# EAGLE board schematic - Copy (EAGLE 8.6.0)

Size 47 x 28 mm. Coordinates in mm from the lower left corner, seen from the top.
Outline: 0,0 47,0 47,28 0,28 0,0
Copper layers (1*16): Top 0.035mm / dielectric 1.5mm / Bottom 0.035mm
Design rules "default": minimum track width 6mil, minimum drill 0.35mm, track to track 6mil, track to pad 6mil, pad to pad 6mil, via to via 6mil, smd to smd 6mil, copper to edge 40mil, drill to drill 6mil, minimum pad ring 10mil, minimum via ring 8mil, stop-mask expansion 4mil, vias tented up to drill 0mil, thermal gap 10mil

## Footprints (pad centres in the part's own frame; a part is rotated, then mirrored left to right if it is on the bottom)
C1210 = smd 1.6 x 2.7: 1 -1.4,0; 2 1.4,0
C0603 = smd 1.1 x 1: 1 -0.85,0; 2 0.85,0
C1206 = smd 1.6 x 1.8: 1 -1.4,0; 2 1.4,0
MINI2-F3-B = smd 1.22 x 0.85: NEG 0,1.55; POS 0,-1.5
FTDI_DEVICE_RA_SMT = smd 1 x 3: 1 -6.35,5; 2 -3.81,5; 3 -1.27,5; 4 1.27,5; 5 3.81,5; 6 6.35,5 | hole 1.4: -5.08,0; 5.08,0
XAL4020 = smd 0.98 x 3.7: 1 -1.185,0; 2 1.185,0
SML0603 = smd 0.8 x 0.8: A 0.75,0; C -0.75,0
WIRELESS-NRF24L01 = drill 1 square: 1 -12.7,6.35 | drill 1: 2 -10.16,6.35; 3 -12.7,3.81; 4 -10.16,3.81; 5 -12.7,1.27; 6 -10.16,1.27; 7 -12.7,-1.27; 8 -10.16,-1.27
CSM-7X-DU = smd 5.5 x 2: 1 -4.75,0; 2 4.75,0
R0603 = smd 1 x 1.1: 1 -0.85,0; 2 0.85,0
PUSHBUTTON_SMD_SJ = smd 2 x 2: P$1 3,0; P$2 -3,0
SOT23-3 = smd 0.8 x 0.9: 1 -0.95,-1; 2 0.95,-1; 3 0,1.1
TQFP32-08 = smd 1.27 x 0.559: 1 -4.293,2.8; 2 -4.293,2; 3 -4.293,1.2; 4 -4.293,0.4; 5 -4.293,-0.4; 6 -4.293,-1.2; 7 -4.293,-2; 8 -4.293,-2.8; 17 4.293,-2.8; 18 4.293,-2; 19 4.293,-1.2; 20 4.293,-0.4; 21 4.293,0.4; 22 4.293,1.2; 23 4.293,2; 24 4.293,2.8 | smd 0.559 x 1.27: 9 -2.8,-4.293; 10 -2,-4.293; 11 -1.2,-4.293; 12 -0.4,-4.293; 13 0.4,-4.293; 14 1.2,-4.293; 15 2,-4.293; 16 2.8,-4.293; 25 2.8,4.293; 26 2,4.293; 27 1.2,4.293; 28 0.4,4.293; 29 -0.4,4.293; 30 -1.2,4.293; 31 -2,4.293; 32 -2.8,4.293
GY-521 = drill 0.8 pad 1.778 long: ADO -8.89,-6.35; GND -8.89,6.35; INT -8.89,-8.89; SCL -8.89,3.81; SDA -8.89,1.27; VCC -8.89,8.89; XCL -8.89,-3.81; XDA -8.89,-1.27
SSOP-16GN = smd 0.419 x 1.143: 1 -2.223,-3.226; 2 -1.587,-3.226; 3 -0.953,-3.226; 4 -0.318,-3.226; 5 0.318,-3.226; 6 0.953,-3.226; 7 1.587,-3.226; 8 2.223,-3.226; 9 2.223,3.226; 10 1.587,3.226; 11 0.953,3.226; 12 0.318,3.226; 13 -0.318,3.226; 14 -0.953,3.226; 15 -1.587,3.226; 16 -2.223,3.226
JST_CONNECTOR_FEMALE = drill 0.889: + 0,1; - 0,-1

## Placement (x,y rotation side)
C1  100uF  [C1210]  -16.51,41.91 0 top  (outside the outline)
C2  0.056uF  [C0603]  5.49,3.73 180 top
C3  10uF  [C0603]  -62.23,54.61 0 top  (outside the outline)
C4  65pF  [C1206]  9.58,8.23 180 top
C5  22uF  [C0603]  -17.78,59.69 0 top  (outside the outline)
C6  470pF  [C0603]  -53.64,44.37 0 top  (outside the outline)
C7  10pF  [C0603]  -24.13,59.69 0 top  (outside the outline)
C8  0.1uF  [C0603]  35,4.37 90 top
C9  0.1uF  [C0603]  9.53,11.71 180 top
C10  0.1uF  [C0603]  -24.13,54.61 0 top  (outside the outline)
C11  0.1uF  [C0603]  12.14,4.24 90 top
C12  27pF  [C0603]  -30.48,59.69 0 top  (outside the outline)
C13  27pF  [C0603]  -36.83,59.69 0 top  (outside the outline)
C14  10uF  [C0603]  -43.18,59.69 0 top  (outside the outline)
C15  0.1uF  [C0603]  -29.18,49.4 0 top  (outside the outline)
D1  DB2W40300L  [MINI2-F3-B]  -59.69,64.77 0 top  (outside the outline)
D2  DB2W40300L  [MINI2-F3-B]  -62.23,64.77 0 top  (outside the outline)
D3  DB2W40300L  [MINI2-F3-B]  -64.77,64.77 0 top  (outside the outline)
D4  DB2W40300L  [MINI2-F3-B]  -67.31,64.77 0 top  (outside the outline)
J1  FTDI_DEVICERA_SMT  [FTDI_DEVICE_RA_SMT]  26.14,1.52 0 bottom
L1  3.3uH  [XAL4020]  3.45,18.8 180 top
LED1  RED  [SML0603]  -35.56,48.26 0 top  (outside the outline)
LED2  RED  [SML0603]  2.11,4.9 270 top
LED3  YELLOW  [SML0603]  -20.32,48.26 0 top  (outside the outline)
LED4  YELLOW  [SML0603]  -29.16,47.68 180 top  (outside the outline)
M1  WIRELESS-NRF24L01  [WIRELESS-NRF24L01]  28.57,15.98 180 bottom
Q1  8MHz  [CSM-7X-DU]  9.73,13 90 bottom
R1  820  [R0603]  -52.07,64.77 0 top  (outside the outline)
R2  10K  [R0603]  8.46,21.79 180 top
R3  10K  [R0603]  11.99,21.92 180 top
R4  200K  [R0603]  9.12,3.51 0 top
R5  10K  [R0603]  -36.83,64.77 0 top  (outside the outline)
R6  374K  [R0603]  -49.53,54.61 0 top  (outside the outline)
R7  15K  [R0603]  -41.91,64.77 0 top  (outside the outline)
R8  162K  [R0603]  5.28,6.02 0 top
R9  820  [R0603]  15.42,4.06 0 top
R10  10K  [R0603]  -48.26,59.69 0 top  (outside the outline)
R11  820  [R0603]  -46.99,64.77 0 top  (outside the outline)
R12  820  [R0603]  15.06,54.81 0 top  (outside the outline)
R13  10K  [R0603]  -58.42,59.69 0 top  (outside the outline)
R14  10K  [R0603]  -63.5,59.69 0 top  (outside the outline)
R15  10K  [R0603]  -16.51,64.77 0 top  (outside the outline)
R16  10K  [R0603]  -21.59,64.77 0 top  (outside the outline)
S2  PUSH_BUTTON  [PUSHBUTTON_SMD_SJ]  26.77,4.09 180 top
T1  NMOS  [SOT23-3]  -19.05,69.85 0 top  (outside the outline)
T2  NMOS  [SOT23-3]  -22.86,69.85 0 top  (outside the outline)
T3  NMOS  [SOT23-3]  -26.67,69.85 0 top  (outside the outline)
T4  NMOS  [SOT23-3]  -30.48,69.85 0 top  (outside the outline)
U1  ATMEGA328P_TQFP  [TQFP32-08]  35.2,16.13 270 top
U2  GY-521MPU6050  [GY-521]  34.9,12.94 180 top
U3  LTC3534  [SSOP-16GN]  4.01,11.89 180 top
U$1  JST_CONNECTOR_FEMALE  [JST_CONNECTOR_FEMALE]  7.8,24.97 270 top
U$4  JST_CONNECTOR_FEMALE  [JST_CONNECTOR_FEMALE]  14.12,24.99 270 top
U$7  JST_CONNECTOR_FEMALE  [JST_CONNECTOR_FEMALE]  20.5,24.99 270 top
U$10  JST_CONNECTOR_FEMALE  [JST_CONNECTOR_FEMALE]  26.8,25.04 270 top
U$13  JST_CONNECTOR_FEMALE  [JST_CONNECTOR_FEMALE]  33.07,25.02 270 top

## Library data of the parts
C1 C4 C8-C11 = rcl; SPICEPREFIX: C
C2 C3 C5-C7 C12-C15 R2-R8 R10 R13-R16 = resistor
D1-D4 M1 U2 U$1 U$4 U$7 U$10 U$13 = quad
J1 = quad; PROD_ID: CONN-08971
L1 = coilcraft
LED1-LED4 = led
Q1 = crystal; OC_FARNELL: unknown; OC_NEWARK: unknown
R1 R9 R11 R12 = rcl; SPICEPREFIX: R
S2 = adafruit
T1-T4 = quad; DATASHEET: http://www.mouser.com/ds/2/196/irlml6244pbf-936666.pdf; MOUSER: 942-IRLML6244TRPBF; URL: http://www.mouser.com/Search/ProductDetail.aspx?R=IRLML6244TRPBFvirtualkey57370000virtualkey942-IRLML6244TRPBF
U1 = quad; PROD_ID: IC-09069
U3 = LTC3534

## Nets
CE: M1.3 U1.11
CSN: M1.4 U1.12
DEBUG_LED1: R12.2 U1.32
DEBUG_LED2: R11.2 U1.2
DTR: C8.1 J1.1
GND: C1.2 C2.2 C3.2 C5.2 C9.2 C10.2 C11.2 C12.2 C13.2 C14.2 C15.2 J1.5 J1.6 LED1.C LED2.C LED3.C LED4.C M1.1 R3.1 R8.1 R13.1 R14.1 R15.1 R16.1 S2.P$1 T1.2 T2.2 T3.2 T4.2 U1.3 U1.5 U1.21 U2.GND U3.1 U3.3 U3.4 U3.7 U3.8 U3.9 U3.16 U$1.-
MISO: M1.7 U1.16
MOSI: M1.6 U1.15
N$1: C12.1 Q1.1 U1.7
N$2: C8.2 R10.1 S2.P$2 U1.29
N$3: D1.POS T1.3 U$4.-
N$4: C13.1 Q1.2 U1.8
N$5: D2.POS T2.3 U$7.-
N$6: D3.POS T3.3 U$10.-
N$7: D4.POS T4.3 U$13.-
N$8: L1.1 U3.5
N$9: L1.2 U3.6
N$10: LED1.A R1.2
N$11: LED2.A R9.1
N$12: LED3.A R12.1
N$13: LED4.A R11.1
N$14: C4.1 R5.1
N$16: C2.1 R4.1 U3.2
N$18: C4.2 C7.2 R6.1 R7.1 R8.2 U3.15
N$19: C6.1 C7.1 U3.14
N$20: C6.2 R7.2
N$25: C11.1 U1.20
PWM1: R13.2 T1.1 U1.1
PWM2: R14.2 T2.1 U1.9
PWM3: R15.2 T3.1 U1.10
PWM4: R16.2 T4.1 U1.13
PWR: C1.1 C3.1 D1.NEG D2.NEG D3.NEG D4.NEG R1.1 R2.2 R4.2 U3.10 U3.12 U3.13 U$1.+ U$4.+ U$7.+ U$10.+ U$13.+
RXD: J1.3 U1.30
SCK: M1.5 U1.17
SCL: U1.28 U2.SCL
SDA: U1.27 U2.SDA
TXD: J1.2 U1.31
V_BAT: R2.1 R3.2 U1.25
V_REG_OUT: C5.1 C9.1 C10.1 C14.1 C15.1 J1.4 M1.2 R5.2 R6.2 R9.2 R10.2 U1.4 U1.6 U1.18 U2.VCC U3.11

## Tracks (layer width: path | path; a pad name or v marks a point on that pad's centre or on a via)
CE  (1 unrouted)
CSN  (1 unrouted)
DEBUG_LED1  (1 unrouted)
DEBUG_LED2  (1 unrouted)
DTR  (1 unrouted)
GND  (40 unrouted)
MISO  (1 unrouted)
MOSI  (1 unrouted)
N$1  (2 unrouted)
N$2  (3 unrouted)
N$3  (2 unrouted)
N$4  (2 unrouted)
N$5  (2 unrouted)
N$6  (2 unrouted)
N$7  (2 unrouted)
N$8  (1 unrouted)
N$9  (1 unrouted)
N$10  (1 unrouted)
N$11  (1 unrouted)
N$12  (1 unrouted)
N$13  (1 unrouted)
N$14  (1 unrouted)
N$16  (2 unrouted)
N$18  (5 unrouted)
N$19  (2 unrouted)
N$20  (1 unrouted)
N$25  (1 unrouted)
PWM1  (2 unrouted)
PWM2  (2 unrouted)
PWM3  (2 unrouted)
PWM4  (2 unrouted)
PWR  (16 unrouted)
RXD  (1 unrouted)
SCK  (1 unrouted)
SCL  (1 unrouted)
SDA  (1 unrouted)
TXD  (1 unrouted)
V_BAT  (2 unrouted)
V_REG_OUT  (15 unrouted)